# Altium PCB SuperPower.PcbDoc
Units mil, origin at the board's own origin, x right, y up, seen from the top; angles counter-clockwise.
Board outline 3000 x 1800 mil, 2 copper layers (Top Layer, Bottom Layer); 38 components, 22 nets, 97 pads, 29 vias.
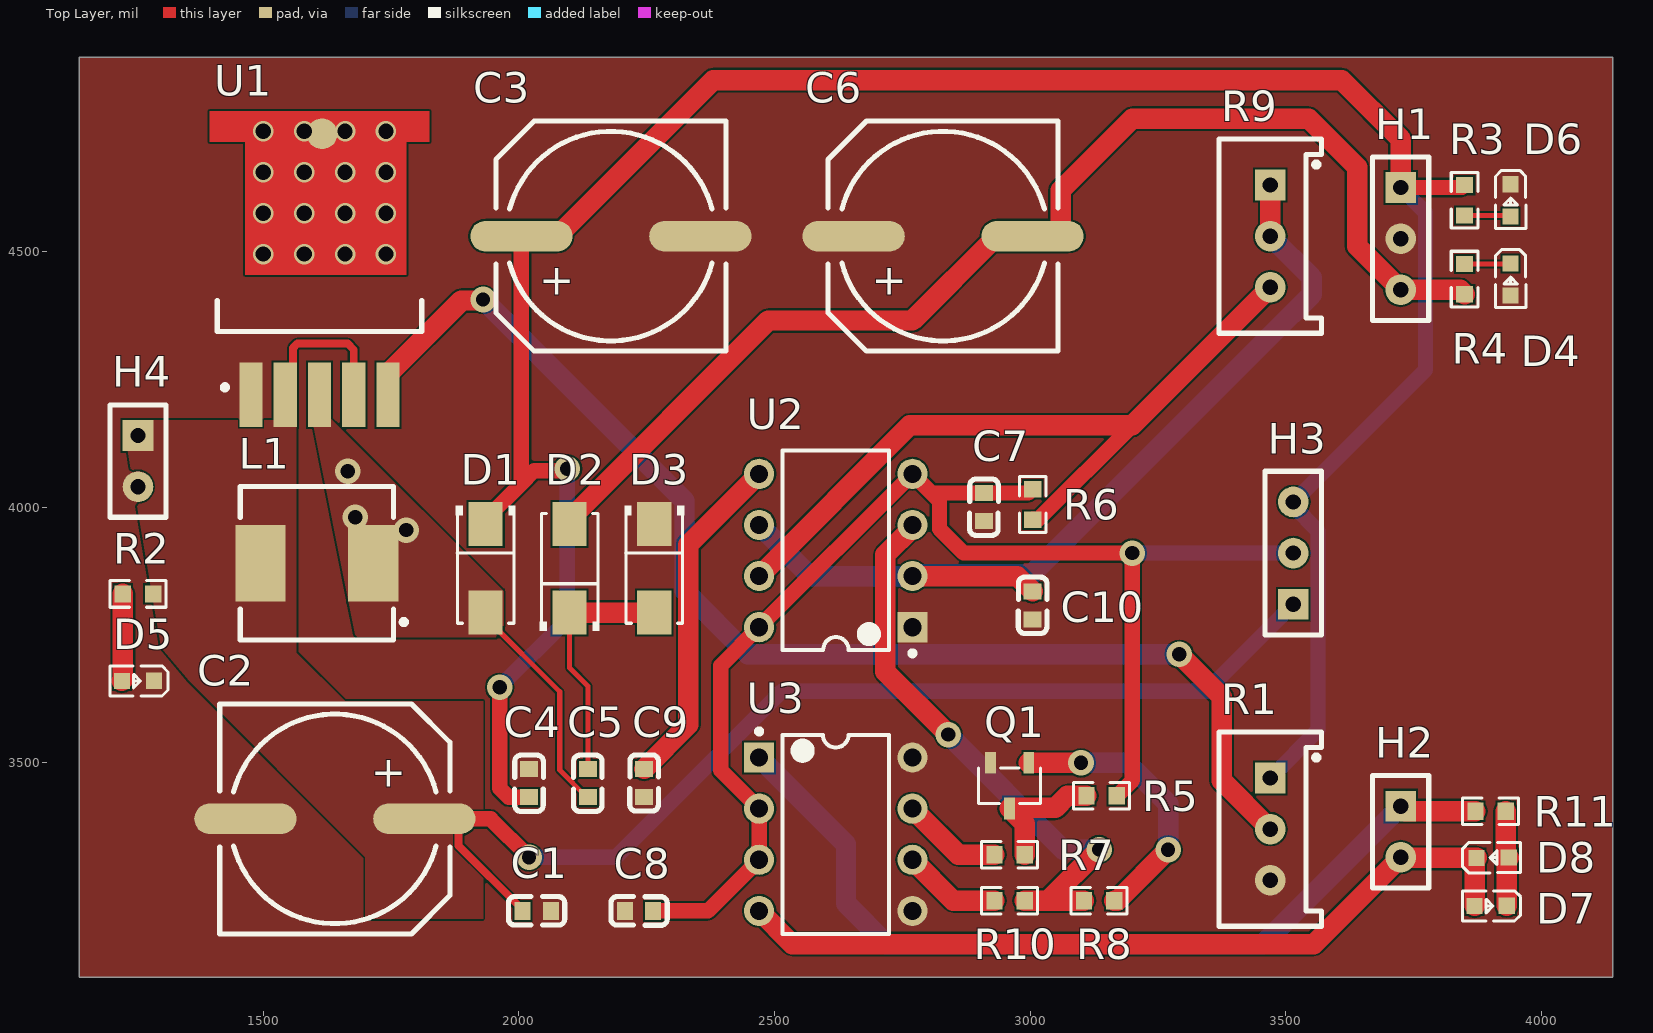
[diagram p0: Top Layer view]
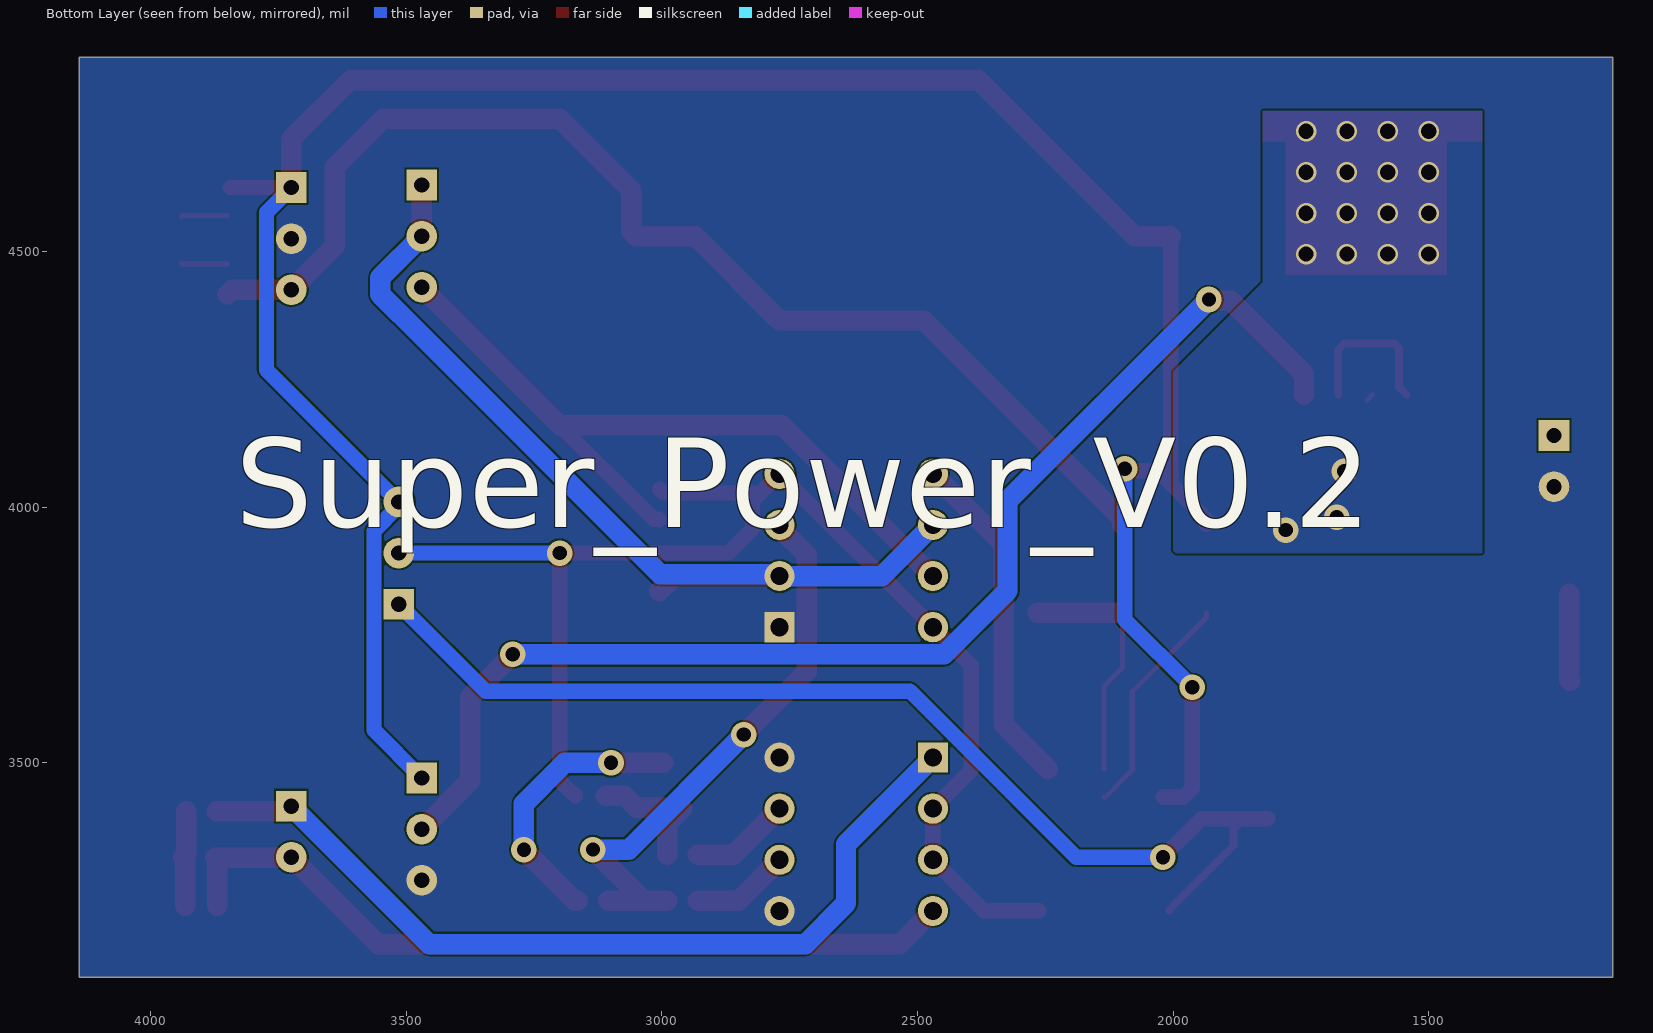
[diagram p1: Bottom Layer view, seen from below]
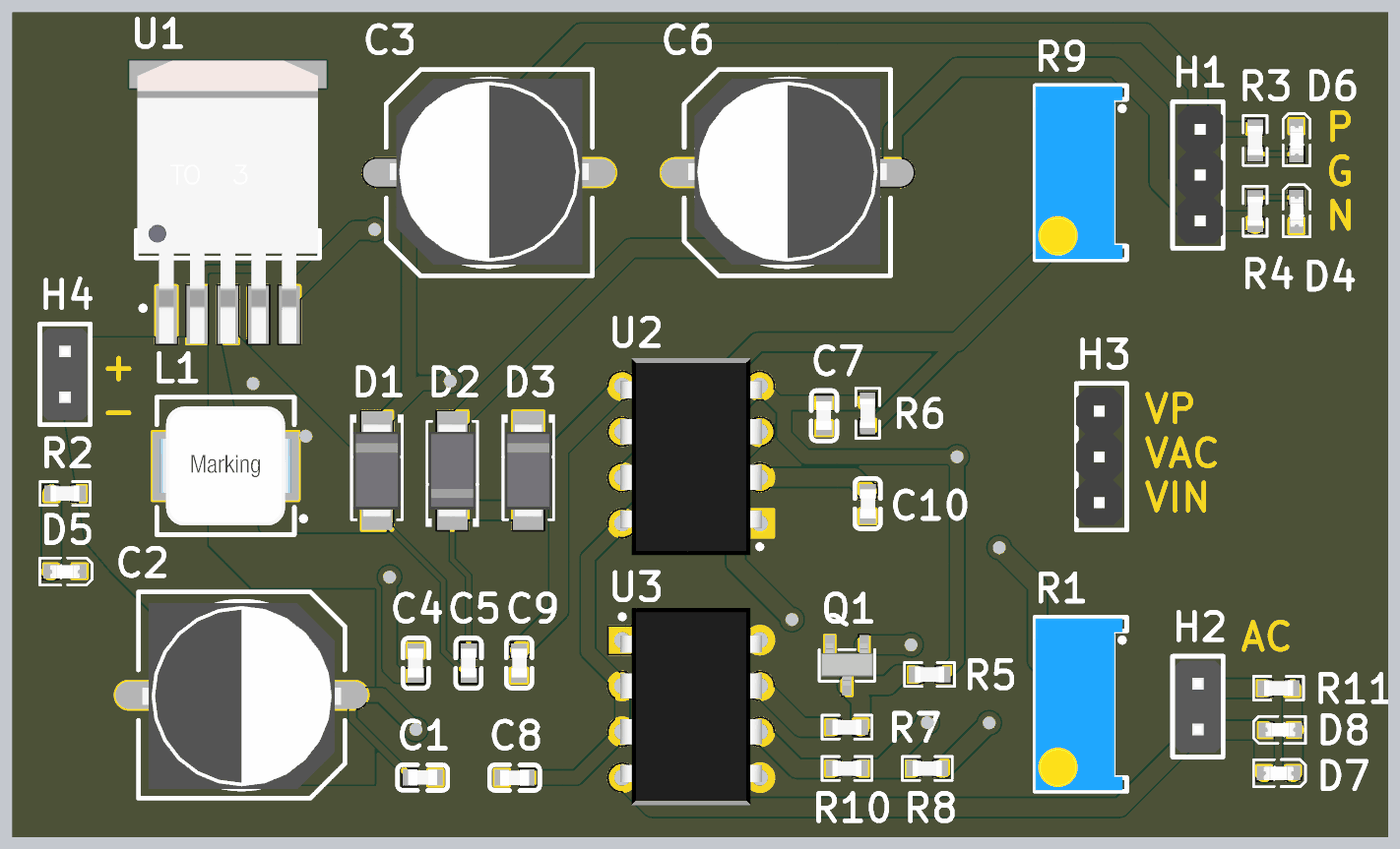
[diagram p2: 3D render of the assembled board from above, using the file's embedded part models]

## Layer stack, top to bottom
Top Solder: solder mask 0.4, Solder Resist, Dk 3.5
Top Layer: signal copper 1.4
Dielectric 1: dielectric 12.6, FR-4, Dk 4.8
Bottom Layer: signal copper 1.4
Bottom Solder: solder mask 0.4, Solder Resist, Dk 3.5

## Board outline
1140,3080 1140,4880 4140,4880 4140,3080

## Design rules (kind name [scope] priority, off if disabled: settings)
Clearance PWR [All] p1: gap=3.5 ignorepadtopadclearanceinfootprint=FALSE
Clearance [All] p2: gap=10 ignorepadtopadclearanceinfootprint=FALSE except(0: Arc-Hole Track-Hole SMDPad-Hole THPad-Hole Via-Hole Fill-Hole Poly-Hole Region-Hole Text-Hole)
HoleSize [All] p1: absolutevalues=TRUE maxlimit=100 minlimit=10 maxpercent=80.000 minpercent=20.000
PolygonConnect [All] p1: connectstyle=Direct reliefconductorwidth=10 reliefentries=4 polygonreliefangle="90 Angle" airgapwidth=10
RoutingVias [All] p1: holewidth=28 width=50 viastyle="Through Hole" minholewidth=28 minwidth=50 maxholewidth=28 maxwidth=50
SilkToSolderMaskClearance [IsPad] p1: minsilkscreentomaskgap=3.5 clearancetoexposedcopper=TRUE
SolderMaskExpansion [All] p1: expansion=4 istentingtop=FALSE
Width PWR_Width [InNetClass('PWR')] p1: maxlimit=50 minlimit=3.5 preferedwidth=15
Width [All] p2: maxlimit=50 minlimit=10 preferedwidth=10
28 further rules are at their usual default settings.

## Classes and differential pairs
net class PWR: AC_OUT1 AC_OUT2 GND V_IN V_INV VN_OUT VP_OUT

## Components (designator, comment, footprint, x,y, rotation, side; value= is the part's Value field where it differs from the comment)
C1 "CAP" C0603 2035,3210 r0 top value=1uF
C2 "CAP_POL" CAP_SMD_10mm 1640,3390 r180 top value=47uF
C3 "CAP_POL" CAP_SMD_10mm 2180,4530 r0 top value=220uF
C4 "CAP" C0603 2020,3460 r90 top value=1uF
C5 "CAP" C0603 2135,3460 r90 top value=1uF
C6 "CAP_POL" CAP_SMD_10mm 2830,4530 r0 top value=220uF
C7 "CAP" C0603 2910,4000 r90 top value=100nF
C8 "CAP" C0603 2235,3210 r180 top value=100nF
C9 "CAP" C0603 2245,3460 r270 top value=100nF
C10 "CAP" C0603 3005,3807.55 r270 top value=100nF
D1 "Diode SBD" SMA_L4.3 1935,3880 r270 top
D2 "Diode SBD" SMA_L4.3 2099.28,3880 r90 top
D3 "Diode SBD" SMA_L4.3 2265,3880 r270 top
D4 "LED" LED0603 3940,4445 r270 top
D5 "LED" LED0603 1255,3660 r180 top
D6 "LED" LED0603 3940,4600 r270 top
D7 "LED" LED0603 3901.1,3220 r180 top
D8 "LED" LED0603 3905,3313.94 r0 top
H1 "Header" H_2.54_P3 3725,4525 r270 top
H2 "Header_P2" H_2.54_P2 3725,3365 r270 top
H3 "Header" H_2.54_P3 3515,3910 r90 top
H4 "Header_P2" H_2.54_P2 1255,4090 r270 top
L1 "INDU" SMD_L7.1 1605,3890 r180 top
Q1 "SS8050" SOT-23-3 2960,3455 r90 top
R1 "Res Tap" RES_TAP_3296 3470,3370 r0 top value=10K
R2 "Reg" R0603 1255,3830 r180 top value=1.5K
R3 "Reg" R0603 3850,4600.16 r270 top value=4.7K
R4 "Reg" R0603 3850,4445.93 r90 top value=4.7K
R5 "Reg" R0603 3140,3435 r0 top value=4.7K
R6 "Reg" R0603 3005,4005 r90 top value=4.7K
R7 "Reg" R0603 2960,3320 r0 top value=1K
R8 "Reg" R0603 3135,3230 r0 top value=1K
R9 "Res Tap" RES_TAP_3296 3470,4530 r0 top value=100K
R10 "Reg" R0603 2960,3230 r0 top value=1K
R11 "Reg" R0603 3900.93,3405 r0 top value=4.7K
U1 "XL6009" TO-263-5 1610,4475 r90 top
U2 "NE555N" DIP-8 2620,3915 r90 top
U3 "L9110" DIP-8 2620,3360 r270 top

## Footprints (in the part's own frame and the unit in brackets; to place one, negate y for a bottom-side part, rotate by r counter-clockwise, add the part's x,y. Pads: shape width x height; smd on the part's side, far side on the other; paste and mask are expansions set on the pad)
C0603 [mm]
  rect 0.8x0.9 smd: 1(-0.7,0) 2(0.7,0)
  silkscreen extent -1.41,-0.71 1.39,0.72, body extent -0.8,-0.41 0.8,0.45, height 0.89
CAP_SMD_10mm [mil] "SMD电容,10mm"
  oval 200x60 smd: 1(-175,0) 2(175,0)
  silkscreen extent -225,-225 225,225, body extent -217,-201 217,205, height 501
DIP-8 [mm] "DIP-8"
  rect 1.5x1.5 hole 0.9: 1(-3.81,-3.81)
  round 1.5 hole 0.9: 2(-1.27,-3.81) 3(1.27,-3.81) 4(3.81,-3.81) 5(3.81,3.81) 6(1.27,3.81) 7(-1.27,3.81) 8(-3.81,3.81)
  silkscreen extent -5.23,-3.93 4.96,2.65, body extent -5.59,-3.93 5.33,3.94, height 5.08
H_2.54_P2 [mil] "2Pin Header"
  rect 60x60 hole 30: 1(-50,0)
  round 60 hole 30: 2(50,0)
  silkscreen extent -110,-55 110,55, body extent -100,-50 100,50, height 336
H_2.54_P3 [mil] "3Pin Header"
  rect 60x60 hole 30: 1(-100,0)
  round 60 hole 30: 2(0,0) 3(100,0)
  silkscreen extent -160,-55 160,55, body extent -150,-45 150,55, height 315
LED0603 [mm]
  rect 0.8x0.8 smd: 1(-0.799,-0.003) 2(0.799,0.004)
  silkscreen extent -1.49,-0.75 1.39,0.76, body extent -0.83,-0.34 0.83,0.38, height 0.68
R0603 [mil]
  rect 31.75x34.02 smd: 1(-29.65,0) 2(29.65,0)
  silkscreen extent -55,-26 55,26, body extent -31,-17 32,17, height 19
RES_TAP_3296 [mil] "精密电位器"
  rect 60x60 hole 30: 1(0,100)
  round 60 hole 30: 2(0,-100) 3(0,0)
  silkscreen extent -100,-190 100,190, body extent -100,-188 90,188, height 455
SMA_L4.3 [mm] "SMA_DIode"
  rect 2.185x1.7 smd: 1(-2.2,0) 2(2.2,0)
  silkscreen extent -3.11,-1.48 2.73,1.48, body extent -2.6,-1.3 2.6,1.3, height 2.4
SMD_L7.1 [mm]
  rect 2.5x3.8 smd: 1(-2.8,0) 2(2.8,0)
  silkscreen extent -4.44,-3.81 3.81,3.81, body extent -3.65,-3.3 3.65,3.3, height 4.95
SOT-23-3 [mm] "SOT-23-3"
  rect 1.07x0.532 smd: 1(1.135,-0.95) 2(1.135,0.95) 3(-1.135,0)
  silkscreen extent -0.88,-1.54 0.88,1.54, body extent -1.14,-1.46 1.2,1.46, height 1.08
TO-263-5 [mil] "TO-263-5"
  rect 125.98x45.28 smd: 1(-255,134) 2(-255,67) 3(-255,0) 4(-255,-67) 5(-255,-134)
  round 60 smd: 6(255,-5)
  Top Layer region: -20.69,145 239.31,145 239.31,215 299.31,215 299.31,-215 239.31,-215 239.31,-169.98 -20.69,-169.98
  silkscreen extent -246,-200 -71,200, body extent -318,-197 299,197, height 190

## Part data
C1 C4 C5 C7 C8 C9 C10: "Cap", BOM_Manufacturer="Huaxin S&T", BOM_Manufacturer Part=0603B103K101CT, BOM_Supplier=LCSC, BOM_Supplier Part=C302008, Contributor=LCSC, nameAlias=Capacitance, spicePre=C, spiceSymbolName=0603B103K101CT
C2 C3 C6: "极性电容"
D1 D2 D3: "Schottky Rectifier", ComponentLink1Description="Manufacturer Link", ComponentLink1URL=http://www.irf.com/, ComponentLink2Description=Datasheet, ComponentLink2URL=http://www.irf.com/product-info/datasheets/data/10tq.pdf, DatasheetVersion=PD-2.057B, LatestRevisionDate=17-Jul-2002, LatestRevisionNote="Re-released for DXP Platform.", Note="Terminal 2 is the TAB and is electrically connected to the cathode", PackageDescription="TO, Thru-Hole, Vertical, Heatsink Mounted; 3 In-Line Leads (1 Absent); Pitch 2.54 mm", PackageReference=TO-220AC, PackageVersion=Feb-1998, Published=8-Jun-2000, Publisher="Altium Limited"
D4 D5 D6 D7 D8: library part LED0, LatestRevisionDate=08-Jul-2005, LatestRevisionNote="Mech Layer 1 removed.", PackageDescription="LED; 2 Leads", PackageReference=LED-0, Published=8-Jun-2000, Publisher="Altium Limited"
H1 H3: library part Header_P3, "3Pin接口"
H2 H4: "2Pin排针"
L1: library part IND, "电感", BOM_JLCPCB Part Class="Extended Part", BOM_Manufacturer="Sunltech Tech", BOM_Manufacturer Part=SLO0630H150MTT, BOM_Supplier=LCSC, BOM_Supplier Part=C182182, Contributor=LCSC, nameAlias=Inductance, spicePre=L, spiceSymbolName=SLO0630H150MTT
Q1: "NPN", BOM_Manufacturer=AnBon, BOM_Manufacturer Part=SS8050, BOM_Paste Type=recommend, BOM_Supplier=LCSC, BOM_Supplier Part=C541705, Contributor=LCSC, spicePre=Q, spiceSymbolName=SS8050_C541705
R1 R9: "可调电阻", LatestRevisionDate=17-Jul-2002, LatestRevisionNote="Re-released for DXP Platform.", PackageDescription="Variable Resistor, Thru-Hole; 3 Leads", PackageReference=VR3, Published=24-Mar-1999, Publisher="Altium Limited", Set Position=0.5, Sim Note="Enter the Resistance value and the set point into parameter fields."
R2 R3 R4 R5 R6 R7 R8 R10 R11: library part Res, "电阻", BOM_Manufacturer="Viking Tech", BOM_Manufacturer Part=AR03BTCX1002A, BOM_Supplier=LCSC, BOM_Supplier Part=C465721, Contributor=LCSC, nameAlias="Resistance (Ohms)", spicePre=R, spiceSymbolName=AR03BTCX1002A
U1: BOM_JLCPCB Part Class="Extended Part", BOM_Manufacturer=TI, BOM_Manufacturer Part=LM2577SX-ADJ/NOPB, BOM_Supplier=LCSC, BOM_Supplier Part=C17117, spicePre=U, spiceSymbolName=LM2577SX-ADJ/NOPB
U2: "NE555_IC", BOM_JLCPCB Part Class="Extended Part", BOM_Manufacturer=HGSEMI, BOM_Manufacturer Part=NE555N, BOM_Supplier=LCSC, BOM_Supplier Part=C398063, Contributor=LCSC, spicePre=U, spiceSymbolName=NE555N
U3: "L9110_HBridge", BOM_JLCPCB Part Class="Extended Part", BOM_Manufacturer=Mixic, BOM_Manufacturer Part=L9110S, BOM_Supplier=LCSC, BOM_Supplier Part=C513306, Contributor=LCSC, spicePre=U, spiceSymbolName=L9110S_C513306

## Via types
v1: diameter 40, hole 30, Top Layer to Bottom Layer, tented both sides, 16 vias
v2: diameter 50, hole 28, Top Layer to Bottom Layer, tented both sides, 13 vias

## Nets (pads, with @x,y where several pads share a name; then routed paths per layer and width w, separated by ;. In a path a pad name is that pad's centre, name@x,y a point inside that pad or via, vN(x,y) a via of type N, cw(c..) or ccw(c..) an arc to the next point about the centre after c; other vN are vias at no path point)
AC_OUT1: H2.1 R11.1 U3.1 | length 1735.8
  Top Layer w40: H2.1 3735,3405 R11.1
  Bottom Layer w40: U3.1 2640,3340 2640,3225 2720,3145 3455,3145 H2.1
AC_OUT2: D7.2 D8.1 H2.2 U3.4 | length 1596.9
  Top Layer w40: U3.4 2535,3145 3555,3145 H2.2 3726.19,3313.81 D8.1 3869.62,3309.9 D7.2
GND: C1.2 C2.2 C3.2 C4.2 C6.1 C7.1 C8.2 C9.2 C10.2 D3.1 D4.2 D5.1 D6.1 H1.2 H4.2 Q1.2 R1.2 U1.1 U2.1 U3.5 U3.8
INV_REF: C10.1 R9.1 R9.3 U2.2 U2.6 | length 1845.5
  Top Layer w40: U2.2 2975.11,3865 C10.1 ; R9.3 R9.1
  Bottom Layer w40: U2.6 2570,3865 U2.2 2773.65,3868.65 3003.65,3868.65 3470,4335 3550.93,4415.93 3550.93,4449.07 R9.3
NetC5_1: C5.1 D1.2 L1.1 U1.3 U1.6 | length 459.1
  Top Layer w10: U1.3 U1.3@1620,4210 ; D1.2 1935,3783.84 2080,3638.84 2080,3485.48 2133.03,3432.45 C5.1
  other v1: 1500,4495 1580,4495 1660,4495 1740,4495 1500,4575 1580,4575 1660,4575 1740,4575 1500,4655 1580,4655 1660,4655 1740,4655 1500,4735 1580,4735 1660,4735 1740,4735
  other v2: 1780,3955 1680,3980 1665,4070
NetC5_2: C5.2 D2.1 D3.2 | length 486.3
  Top Layer w10: D2.1 2099.28,3685.72 2135,3650 C5.2
  Top Layer w40: D2.1 D3.2
NetC9_1: C9.1 U2.5 | length 670.6
  Top Layer w40: C9.1 2331.5,3574.05 2331.5,3926.5 U2.5
NetD4_1: D4.1 R4.2 | length 90.2
  Top Layer w10: R4.2 3938.97,4475.59 D4.1
NetD5_2: D5.2 R2.2 | length 170.9
  Top Layer w40: D5.2 1225.35,3661.68 R2.2
NetD6_2: D6.2 R3.2 | length 91
  Top Layer w10: R3.2 3938.15,4570.51 D6.2
NetD7_1: D7.1 D8.2 R11.2 | length 188.9
  Top Layer w40: R11.2 3930.59,3319.97 D8.2 3932.57,3310.18 D7.1
NetQ1_1: Q1.1 R8.2 | length 542.7
  Top Layer w40: Q1.1 v2(3099.68,3499.68) ; R8.2 3170.64,3230 v2(3270,3329.36)
  Bottom Layer w40: v2(3099.68,3499.68) 3190.32,3499.68 3270,3420 v2(3270,3329.36)
NetQ1_3: Q1.3 R5.1 R7.2 | length 268.1
  Top Layer w40: R7.2 2989.66,3380.66 2969.53,3400.78 2969.53,3409.25 2968.46,3410.31 Q1.3 2961.06,3411.37 3049.53,3411.37 3073.15,3435 R5.1
NetR1_3: R1.3 U1.5 | length 2454.9
  Top Layer w40: U1.5 1744,4260.35 1887.73,4404.09 1928.09,4404.09 v2(1930,4406) ; v2(3291.97,3711.97) 3375,3628.95 3375,3465 R1.3
  Bottom Layer w40: v2(1930,4406) 2324.02,4011.98 2324.02,3835.99 2448.04,3711.97 v2(3291.97,3711.97)
NetR6_1: R6.1 R9.2 U2.7 | length 1505.5
  Top Layer w30: R6.1 3005.88,3976.22 3016.22,3976.22 3200,4160
  Top Layer w40: U2.7 2765,4160 3200,4160 R9.2
NetR7_1: R7.1 U3.7 | length 197.6
  Top Layer w40: U3.7 2860,3320 R7.1
NetR8_1: R8.1 R10.2 U2.3 | length 1128.2
  Top Layer w40: U2.3 2770,3959.84 2716.97,3906.82 2716.97,3678.03 v2(2840,3555) ; R10.2 3035,3230 ; R8.1 3035,3230 ; v2(3135,3330) 3035,3230
  Bottom Layer w40: v2(2840,3555) 3065,3330 v2(3135,3330)
NetR10_1: R10.1 U3.6 | length 193.5
  Top Layer w40: U3.6 2850,3230 R10.1
V_IN: C1.1 C2.1 H3.1 H4.1 L1.2 R2.1 U1.2 U1.4 | length 2489.7
  Top Layer w15: U1.2 1558.14,4235.14 1558.14,4311.21 1566.92,4320 1665,4320 1677,4308 U1.4 ; C2.1@1861.13,3390 1881.91,3369.21 1881.91,3337.5 2007.44,3211.97 C1.1
  Top Layer w30: C2.1 1861.13,3390 1945,3390 v2(2020,3315)
  Bottom Layer w30: v2(2020,3315) 2189.78,3315 2514.78,3640 3345,3640 H3.1
V_INV: C7.2 C8.1 H3.2 R5.2 R6.2 U2.4 U2.8 U3.2 U3.3 | length 2712.6
  Top Layer w30: C8.1 2370,3210 U3.3 U3.2 2395,3485 2395,3690 U2.8 U2.4 2811.38,4023.62 2822.78,4012.22 2822.78,3957.22 2870,3910 v2(3200,3910) 3200,3465.34 3171.66,3437.01 3170.53,3437.01 3169.66,3436.13 R5.2 ; 2815.31,4027.55 C7.2 2996.77,4027.55 3003.87,4034.66 R6.2
  Bottom Layer w30: v2(3200,3910) H3.2
VN_OUT: C6.2 D2.2 H1.3 R4.1 | length 2365.4
  Top Layer w40: D2.2 2099.28,3976.16 2488.12,4365 2770,4365 2935,4530 C6.2 3050.76,4530 3060,4539.24 3060,4620 3200,4760 3545,4760 3640,4665 3640,4510 H1.3 3841.28,4425 R4.1
VP_OUT: C3.1 C4.1 D1.1 H1.1 H3.3 R1.1 R3.1 | length 4895.8
  Top Layer w10: R3.1@3845.18,4625 R3.1
  Top Layer w30: D1.1 1935,3976.16 2005,4046.16 ; v2(1962.56,3647.55) 1962.56,3450.02 1980.13,3432.45 C4.1 ; C3.1 2005,4046.16 ; v2(2095,4075) 2091.17,4071.17 2030.01,4071.17 2005,4046.16 ; H1.1 R3.1@3845.18,4625
  Top Layer w40: C3.1 2075,4530 2380,4835 3610,4835 3725,4720 H1.1
  Bottom Layer w30: v2(1962.56,3647.55) 2095,3780 v2(2095,4075) ; R1.1 3563.5,3563.5 3563.5,3953.38 3515,4001.88 H3.3 3773.5,4268.5 3773.5,4576.5 H1.1

## Polygon pours and split planes (outlines as drawn)
GND on Top Layer "GND_L01_P004" (solid, pour order 4): 1140,4880 4140,4880 4140,3080.26 4140.22,3080.05 4140.17,3080 1140,3080
V_IN on Top Layer "V_IN_L01_P000" (solid, pour order 0): 1225,4170 1565,4170 1565,3715 1660,3620 1930,3620 1930,3195 1700,3195 1700,3315 1355.14,3659.86 1300,3725
NetC5_1 on Top Layer "NETC5_1_L01_P003" (solid, pour order 3): 1590,4200 1630,4200 1630,4175 1970,3835 1970,3745 1685,3745 1680,3750
GND on Bottom Layer "GND_L02_P005" (solid, pour order 5): 1140,4880 1140,3080 4140,3080 4140,4880
NetC5_1 on Bottom Layer "NETC5_1_L02_P001" (solid, pour order 1): 1395,4775 1395,3910 1995,3910 2000,3915 2000,4265 1825,4440 1825,4775

## Silkscreen, mask and mechanical layers (free items; w line width, h text height)
Bottom Overlay:
  text "Super_Power_V0.2" at 3835,3903.12 h300
Top Solder:
  text "P / G / N" at 4000,4390 h60
  text "+ / -" at 1330,4010 h60
  text "VP / VAC / VIN" at 3605,3775 h60
  text "AC" at 3815,3460 h60
Mechanical 1:
  the board outline again, w10

## Text inside footprints (layer, text, board x,y; h text height)
C2: Top Overlay "+" at 1780,3505 h60 r180
C3: Top Overlay "+" at 2040,4415 h60
C6: Top Overlay "+" at 2690,4415 h60